# Altium PCB ADG3300-BREAKOUT.PcbDoc
Units mm, origin at the board's own origin, x right, y up, seen from the top; angles counter-clockwise.
Board outline 15.24 x 25.4 mm, 2 copper layers (Top Layer, Bottom Layer), stack 1.57 mm thick; 5 components, 20 nets, 44 pads, 11 vias.
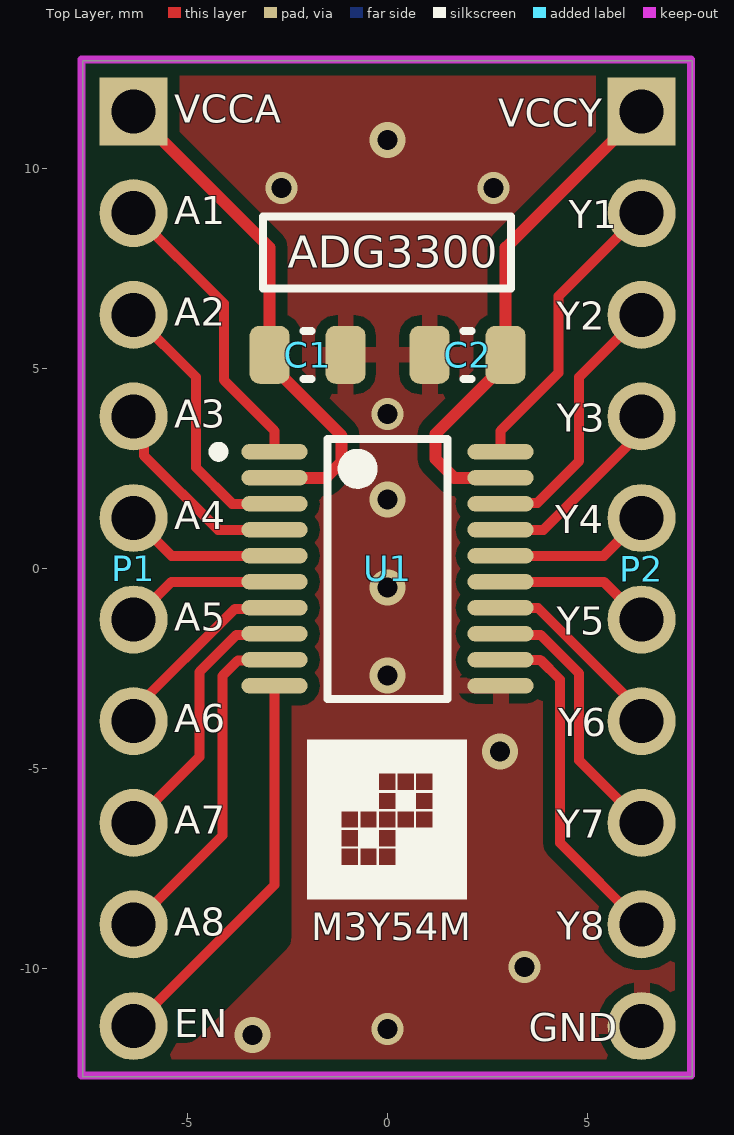
[diagram p0: Top Layer view]
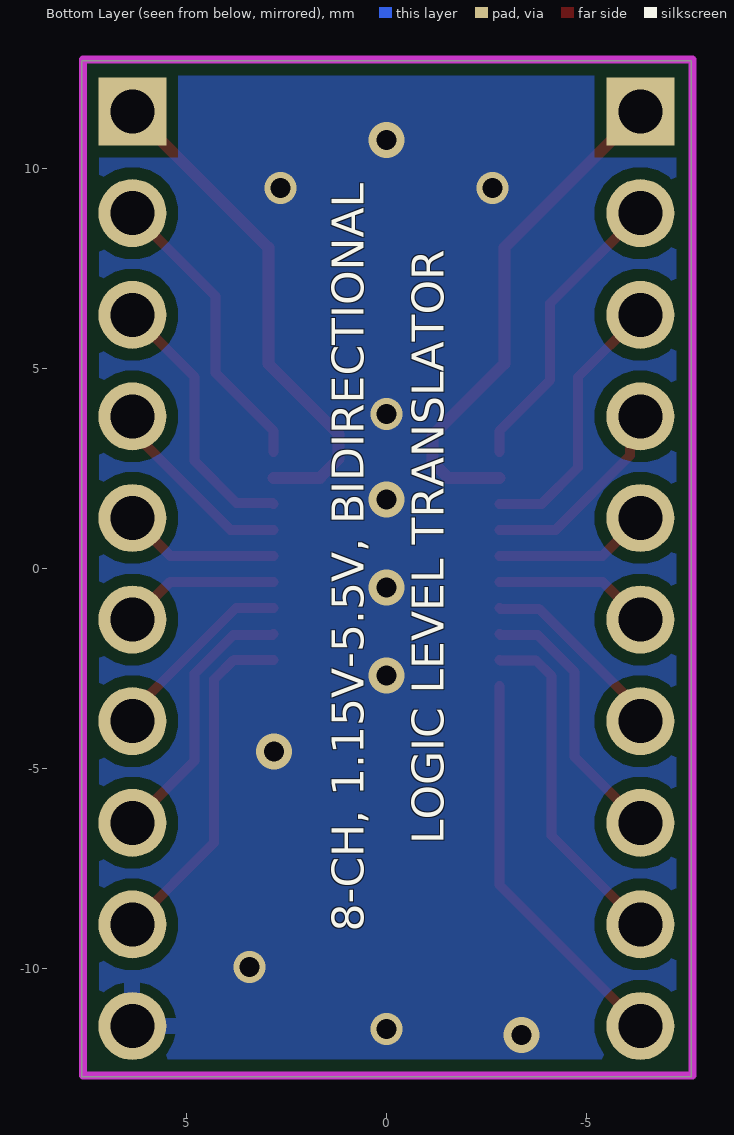
[diagram p1: Bottom Layer view, seen from below]
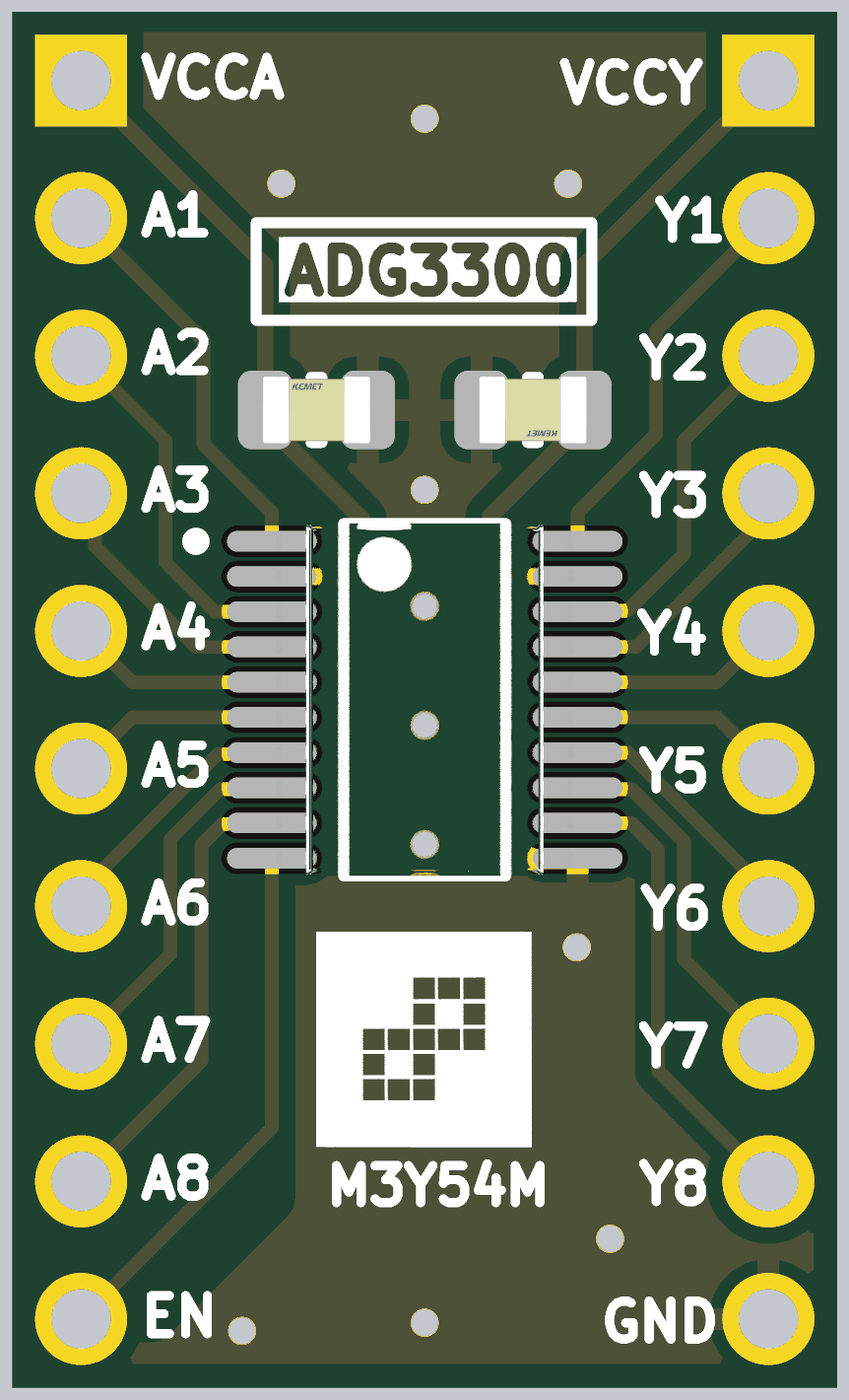
[diagram p2: 3D render of the assembled board from above, using the file's embedded part models]

## Layer stack, top to bottom
Top Solder: solder mask 0.015, Solder Resist, Dk 3.5
Top Layer: signal copper 0.035
Dielectric 1: dielectric 1.5, FR-4, Dk 4.2
Bottom Layer: signal copper 0.035
Bottom Solder: solder mask 0.015, Solder Resist, Dk 3.5

## Board outline
-7.62,-12.7 7.62,-12.7 7.62,12.7 -7.62,12.7

## Design rules (kind name [scope] priority, off if disabled: settings)
BoardOutlineClearance [All] p1: gap=0.2 ignorepadtopadclearanceinfootprint=FALSE
Clearance Clearance_Polygon_Fiducials [All vs InComponent('FID?')] p1: gap=1.3 ignorepadtopadclearanceinfootprint=FALSE
Clearance Clearance_Polygon [InPolygon] p2: gap=0.3 ignorepadtopadclearanceinfootprint=FALSE
Clearance [All] p3: gap=0.15 ignorepadtopadclearanceinfootprint=FALSE except(0: Arc-Hole Track-Hole SMDPad-Hole THPad-Hole Via-Hole Fill-Hole Poly-Hole Region-Hole Text-Hole)
HoleSize [All] p1: absolutevalues=TRUE maxlimit=3.5 minlimit=0.3 maxpercent=80.000 minpercent=20.000
MinimumSolderMaskSliver [All] p1: minsoldermaskwidth=0.15
PolygonConnect PolygonConnect_Via [IsVia] p1: connectstyle=Direct reliefconductorwidth=0.4 reliefentries=4 polygonreliefangle="90 Angle" airgapwidth=0.25
PolygonConnect [All] p2: connectstyle=Relief reliefconductorwidth=0.4 reliefentries=4 polygonreliefangle="90 Angle" airgapwidth=0.25
RoutingVias [All] p1: holewidth=0.4 width=0.7 viastyle="Through Hole" minholewidth=0.4 minwidth=0.6 maxholewidth=2 maxwidth=3
SilkToSilkClearance [All] p1: silktosilkclearance=0.15
SilkToSolderMaskClearance [IsPad] p1: minsilkscreentomaskgap=0.1 clearancetoexposedcopper=TRUE
SolderMaskExpansion SolderMaskExpansion_Via [IsVia] p1: expansion=0.102 istentingtop=TRUE soldermaskfromhole=TRUE
SolderMaskExpansion [All] p2: expansion=0.102 istentingtop=FALSE
Width [All] p1: maxlimit=2 minlimit=0.25 preferedwidth=0.3
26 further rules are at their usual default settings.

## Components (designator, comment, footprint, x,y, rotation, side; value= is the part's Value field where it differs from the comment)
C1 "CC0805KRX7R9BB104" C0805 -2,5.35 r0 top value=100nF_50V
C2 "CC0805KRX7R9BB104" C0805 2,5.35 r180 top value=100nF_50V
P1 "CON-HDR-1X10" CON-HDR-1X10-2.54 -6.35,11.43 r270 top
P2 "CON-HDR-1X10" CON-HDR-1X10-2.54 6.35,11.43 r270 top
U1 "ADG3300BRUZ" TSSOP-20 0,0 r0 top

## Footprints (in the part's own frame and the unit in brackets; to place one, negate y for a bottom-side part, rotate by r counter-clockwise, add the part's x,y. Pads: shape width x height; smd on the part's side, far side on the other; paste and mask are expansions set on the pad)
C0805 [mm] "FP-C0805C-DN-MFG"
  rrect50% 1x1.45 smd paste+0 mask+0: 1(-0.95,0) 2(0.95,0)
  silkscreen extent -0.1,-0.6 0.1,0.6, body extent -1.4,-0.85 1.4,0.85, height 0.25
CON-HDR-1X10-2.54 [mm] "Connector; Header; 10 Position, 2.54 Pitch"
  rect 1.7x1.7 hole 1.1 paste-1000 mask+0: 1(0,0)
  round 1.7 hole 1.1 paste-1000 mask+0: 2(2.54,0) 3(5.08,0) 4(7.62,0) 5(10.16,0) 6(12.7,0) 7(15.24,0) 8(17.78,0) 9(20.32,0) 10(22.86,0)
TSSOP-20 [mm] "FP-PW0020A-IPC_B"
  oval 1.655x0.381 smd: 1(-2.825,2.925) 2(-2.825,2.275) 3(-2.825,1.625) 4(-2.825,0.975) 5(-2.825,0.325) 6(-2.825,-0.325) 7(-2.825,-0.975) 8(-2.825,-1.625) 9(-2.825,-2.275) 10(-2.825,-2.925) 11(2.825,-2.925) 12(2.825,-2.275) 13(2.825,-1.625) 14(2.825,-0.975) 15(2.825,-0.325) 16(2.825,0.325) 17(2.825,0.975) 18(2.825,1.625) 19(2.825,2.275) 20(2.825,2.925)
  silkscreen extent -4.35,-3.25 1.5,3.25, body extent -3.9,-3.5 3.9,3.5, height 0.25

## Part data
C1 C2: library part CAPACITOR, "50V 100nF X7R ±10% 0805 Multilayer Ceramic Capacitors MLCC - SMD/SMT ROHS", Manufacturer=YAGEO, Package=0805, Category=Capacitor, Mounting=SMD
P1 P2: "Pin Header, 10-Pin", LatestRevisionDate=17-Jul-2002, LatestRevisionNote="Re-released for DXP Platform.", Publisher="Altium Limited"
U1: library part ADG3300, "Low Voltage 1.15 V to 5.5 V, 8-Channel Bidirectional Logic Level Translator, -40 to 85 degC, 20-pin SOP (RU-20), Tube", Manufacturer="Analog Devices", Bus Enable Time (typ)=1us, Code_JEDEC=MO-153AC, ComponentLink1Description="Manufacturer URL", ComponentLink1URL=http://www.analog.com/en/index.html, ComponentLink2Description=Datasheet, ComponentLink2URL=http://www.analog.com/static/imported-files/data_sheets/ADG3300.pdf, ComponentLink3Description="Package Specification", ComponentLink3URL=http://www.analog.com/static/imported-files/packages/364515793657813558433715854054607941441RU20.pdf, DatasheetVersion="Rev. 0", Mounting Technology="Surface Mount", PackageDescription="20-Pin Thin Shrink Small Outline Package, Body 6.5 x 4.4 mm, Pitch 0.65 mm", PackageReference=RU-20, PackageVersion=Jan-03, PartNumber=ADG3300BRUZ

## Via types
v1: diameter 0.9, hole 0.5, Top Layer to Bottom Layer, tented both sides, 6 vias
v2: diameter 0.8, hole 0.5, Top Layer to Bottom Layer, tented both sides, 5 vias

## Nets (pads, with @x,y where several pads share a name; then routed paths per layer and width w, separated by ;. In a path a pad name is that pad's centre, name@x,y a point inside that pad or via, vN(x,y) a via of type N, cw(c..) or ccw(c..) an arc to the next point about the centre after c; other vN are vias at no path point)
A1: P1.2 U1.1 | length 7.4
  Top Layer w0.25: P1.2 -4.09,6.63 -4.09,4.715 -2.825,3.45 U1.1
A2: P1.3 U1.3 | length 6.8
  Top Layer w0.25: P1.3 -4.791,4.791 -4.791,2.531 -3.885,1.625 U1.3
A3: P1.4 U1.4 | length 5.1
  Top Layer w0.25: P1.4 -6.094,3.554 -6.094,2.834 -4.235,0.975 U1.4
A4: P1.5 U1.5 | length 3.9
  Top Layer w0.25: P1.5 -5.405,0.325 U1.5
A5: P1.6 U1.6 | length 3.9
  Top Layer w0.25: P1.6 -5.405,-0.325 U1.6
A6: P1.7 U1.7 | length 4.9
  Top Layer w0.25: P1.7 -6.35,-3.534 -3.816,-1 -2.85,-1 U1.7
A7: P1.8 U1.8 | length 6.7
  Top Layer w0.25: P1.8 -4.7,-4.7 -4.7,-2.575 -3.775,-1.65 -2.85,-1.65 U1.8
A8: P1.9 U1.9 | length 8.6
  Top Layer w0.25: P1.9 -4.125,-6.665 -4.125,-2.675 -3.744,-2.294 -2.844,-2.294 U1.9
EN: P1.10 U1.10 | length 10
  Top Layer w0.25: P1.10 -2.825,-7.905 U1.10
GND: C1.2 C2.2 P2.10 U1.11
  other v1: -3.375,-11.65 2.81,-4.57 0,-2.67 0,-0.472 0,1.727 0,10.725
  other v2: 0,-11.5 3.425,-9.95 0,3.875 -2.65,9.525 2.65,9.525
VCCA: C1.1 P1.1 U1.2 | length 12.8
  Top Layer w0.3: P1.1 -2.95,8.03 C1.1 -2.95,5.125 -1.15,3.325 -1.15,2.67 -1.545,2.275 U1.2
VCCY: C2.1 P2.1 U1.19 | length 12.6
  Top Layer w0.3: U1.19 1.665,2.275 1.2,2.74 1.2,3.375 2.95,5.125 C2.1 2.95,8.03 P2.1
Y1: P2.2 U1.20 | length 7.4
  Top Layer w0.25: U1.20 2.825,3.45 4.275,4.9 4.275,6.815 P2.2
Y2: P2.3 U1.18 | length 6.7
  Top Layer w0.25: U1.18 2.844,1.644 3.744,1.644 4.791,2.691 4.791,4.791 P2.3
Y3: P2.4 U1.17 | length 4.9
  Top Layer w0.25: U1.17 3.9,0.975 6.35,3.425 P2.4
Y4: P2.5 U1.16 | length 3.9
  Top Layer w0.25: U1.16 5.405,0.325 P2.5
Y5: P2.6 U1.15 | length 3.9
  Top Layer w0.25: U1.15 5.405,-0.325 P2.6
Y6: P2.7 U1.14 | length 4.8
  Top Layer w0.25: U1.14 2.828,-0.977 3.76,-0.977 6.35,-3.567 P2.7
Y7: P2.8 U1.13 | length 6.8
  Top Layer w0.25: U1.13 2.85,-1.65 3.825,-1.65 4.791,-2.616 4.791,-4.791 P2.8
Y8: P2.9 U1.12 | length 8.7
  Top Layer w0.25: U1.12 3.815,-2.275 4.31,-2.77 4.31,-6.85 P2.9

## Polygon pours and split planes (outlines as drawn)
GND on Bottom Layer "GND_L02_P001" (solid, remove dead copper, pour order 1): -7.62,-12.7 7.62,-12.7 7.62,12.7 -7.62,12.7
GND on Top Layer "GND_L01_P000" (solid, remove dead copper, pour order 0): -7.62,-12.7 7.62,-12.7 7.62,12.7 -7.62,12.7

## Keep-outs
Keep-Out Layer:
  lines w0.2: -7.65,-12.67 -7.65,12.73 7.59,12.73 7.59,-12.67 -7.65,-12.67

## Silkscreen, mask and mechanical layers (free items; w line width, h text height)
Top Overlay:
  drawing of 5 lines, arcs and shapes, not listed
  text "VCCA" at -5.33,11.15 h0.7
  text "VCCY" at 2.769,11.05 h0.7
  text "A1" at -5.33,8.61 h0.7
  text "Y1" at 4.529,8.51 h0.7
  text "ADG3300" at -2.491,7.53 h0.8
  text "A2" at -5.33,6.07 h0.7
  text "Y2" at 4.229,5.97 h0.7
  text "A3" at -5.33,3.53 h0.7
  text "Y3" at 4.229,3.43 h0.7
  text "A4" at -5.33,0.99 h0.7
  text "Y4" at 4.196,0.89 h0.7
  text "A5" at -5.33,-1.55 h0.7
  text "Y5" at 4.229,-1.65 h0.7
  text "A6" at -5.33,-4.09 h0.7
  text "Y6" at 4.262,-4.19 h0.7
  text "A7" at -5.33,-6.63 h0.7
  text "Y7" at 4.229,-6.73 h0.7
  text "A8" at -5.33,-9.17 h0.7
  text "Y8" at 4.229,-9.27 h0.7
  text "M3Y54M" at -1.91,-9.29 h0.68
  text "EN" at -5.33,-11.71 h0.7
  text "GND" at 3.533,-11.81 h0.7
Bottom Overlay:
  text "LOGIC LEVEL TRANSLATOR" at -1.44,-6.883 h0.8 r270
  text "8-CH, 1.15V-5.5V, BIDIRECTIONAL" at 0.562,-9.07 h0.8 r270